# Altium PCB CT310高端控制盒右摇杆电路V1.0.PcbDoc
Units mil, origin at the board's own origin, x right, y up, seen from the top; angles counter-clockwise.
Board outline 1470 x 1470 mil, 2 copper layers (Top Layer, Bottom Layer), stack 65.792 mil thick; 2 components, 4 nets, 16 pads, 4 vias.
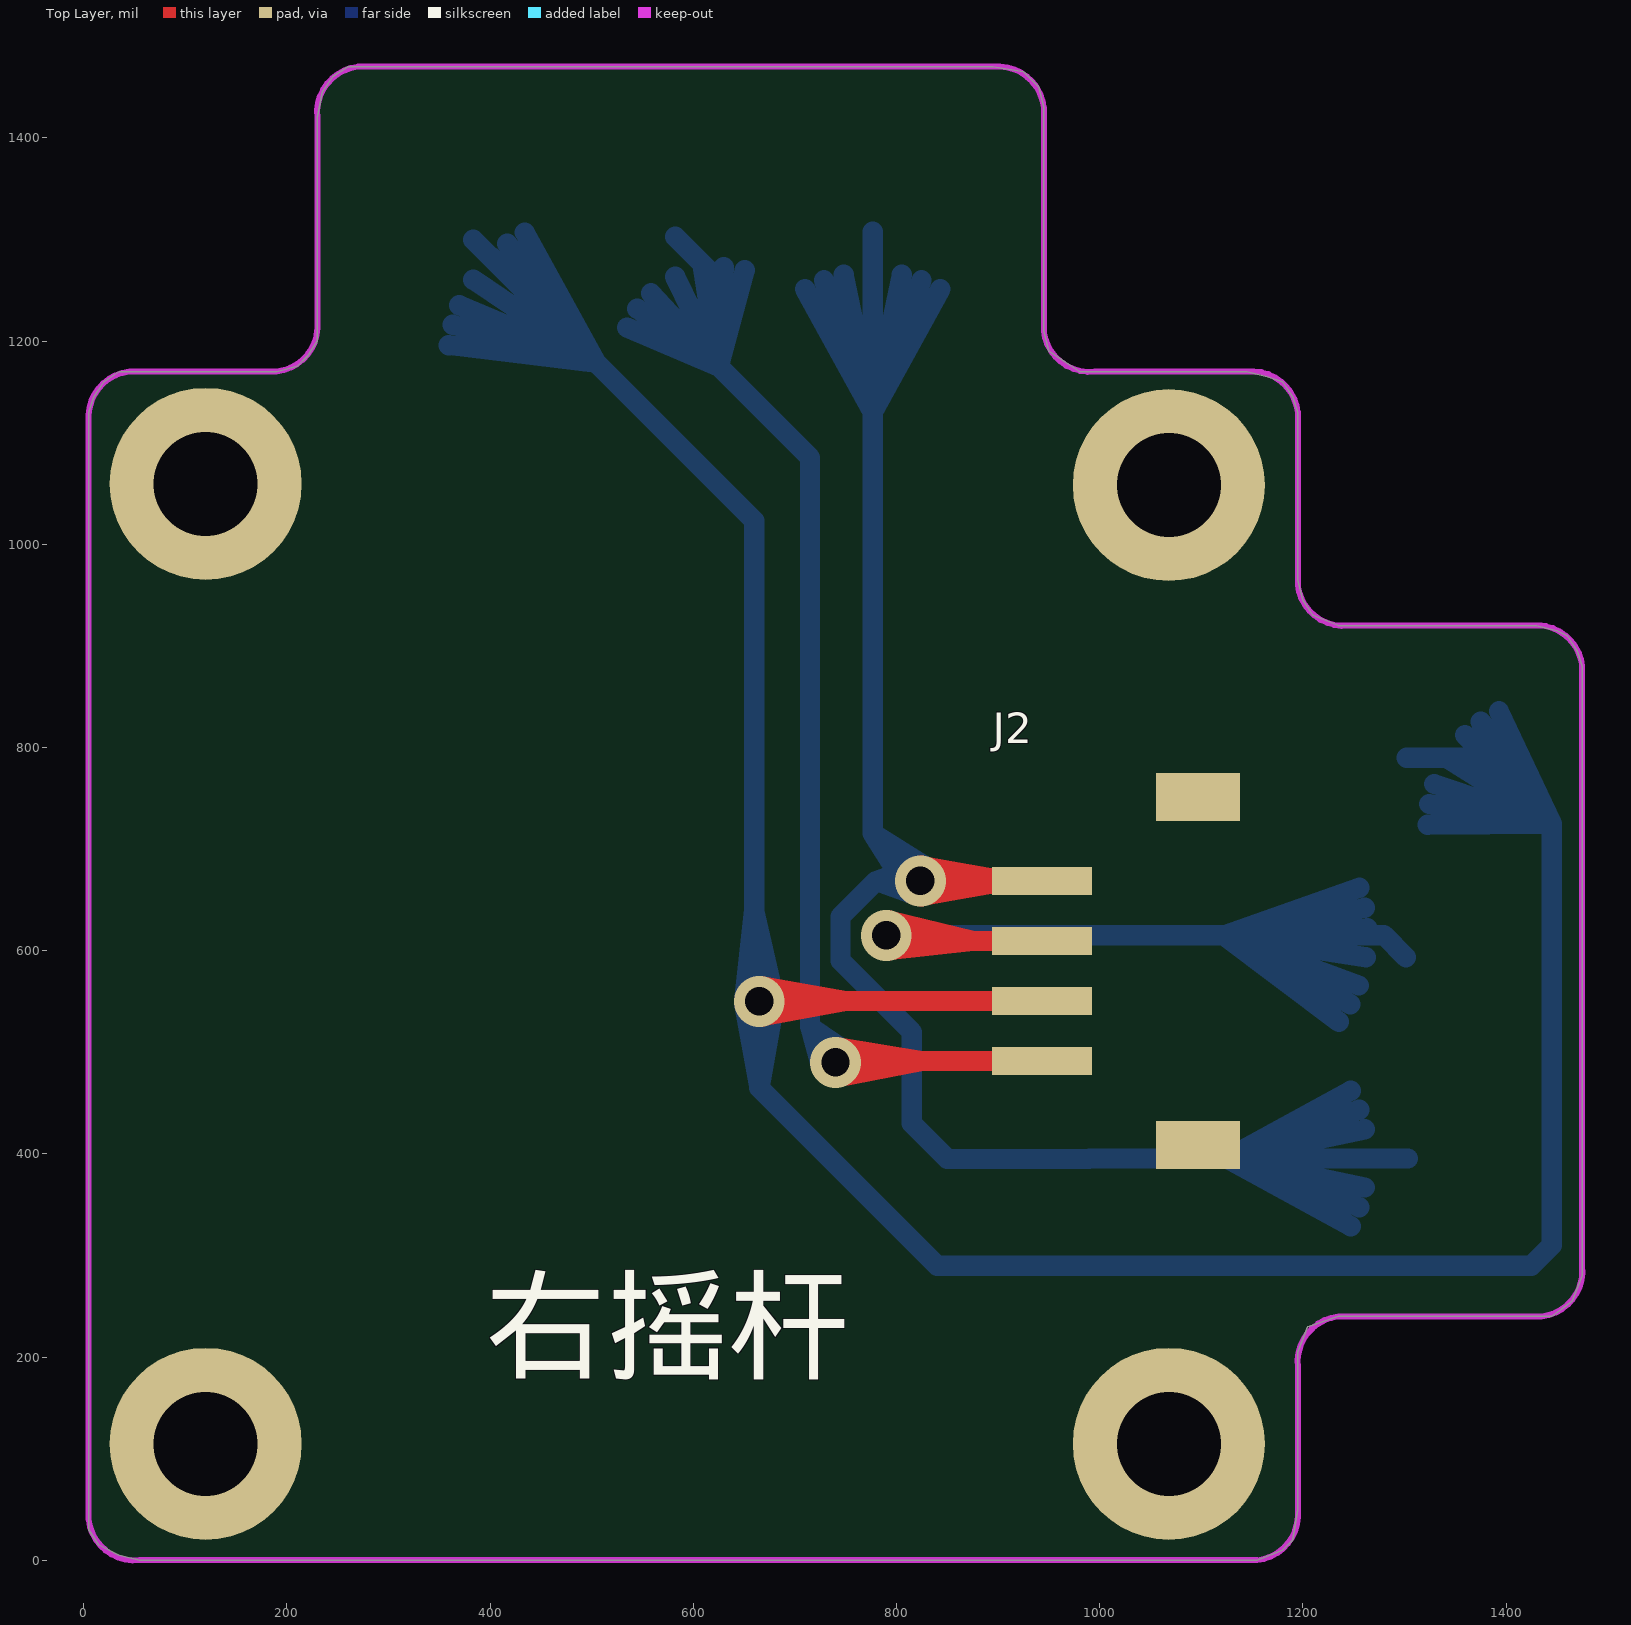
[diagram p0: Top Layer view]
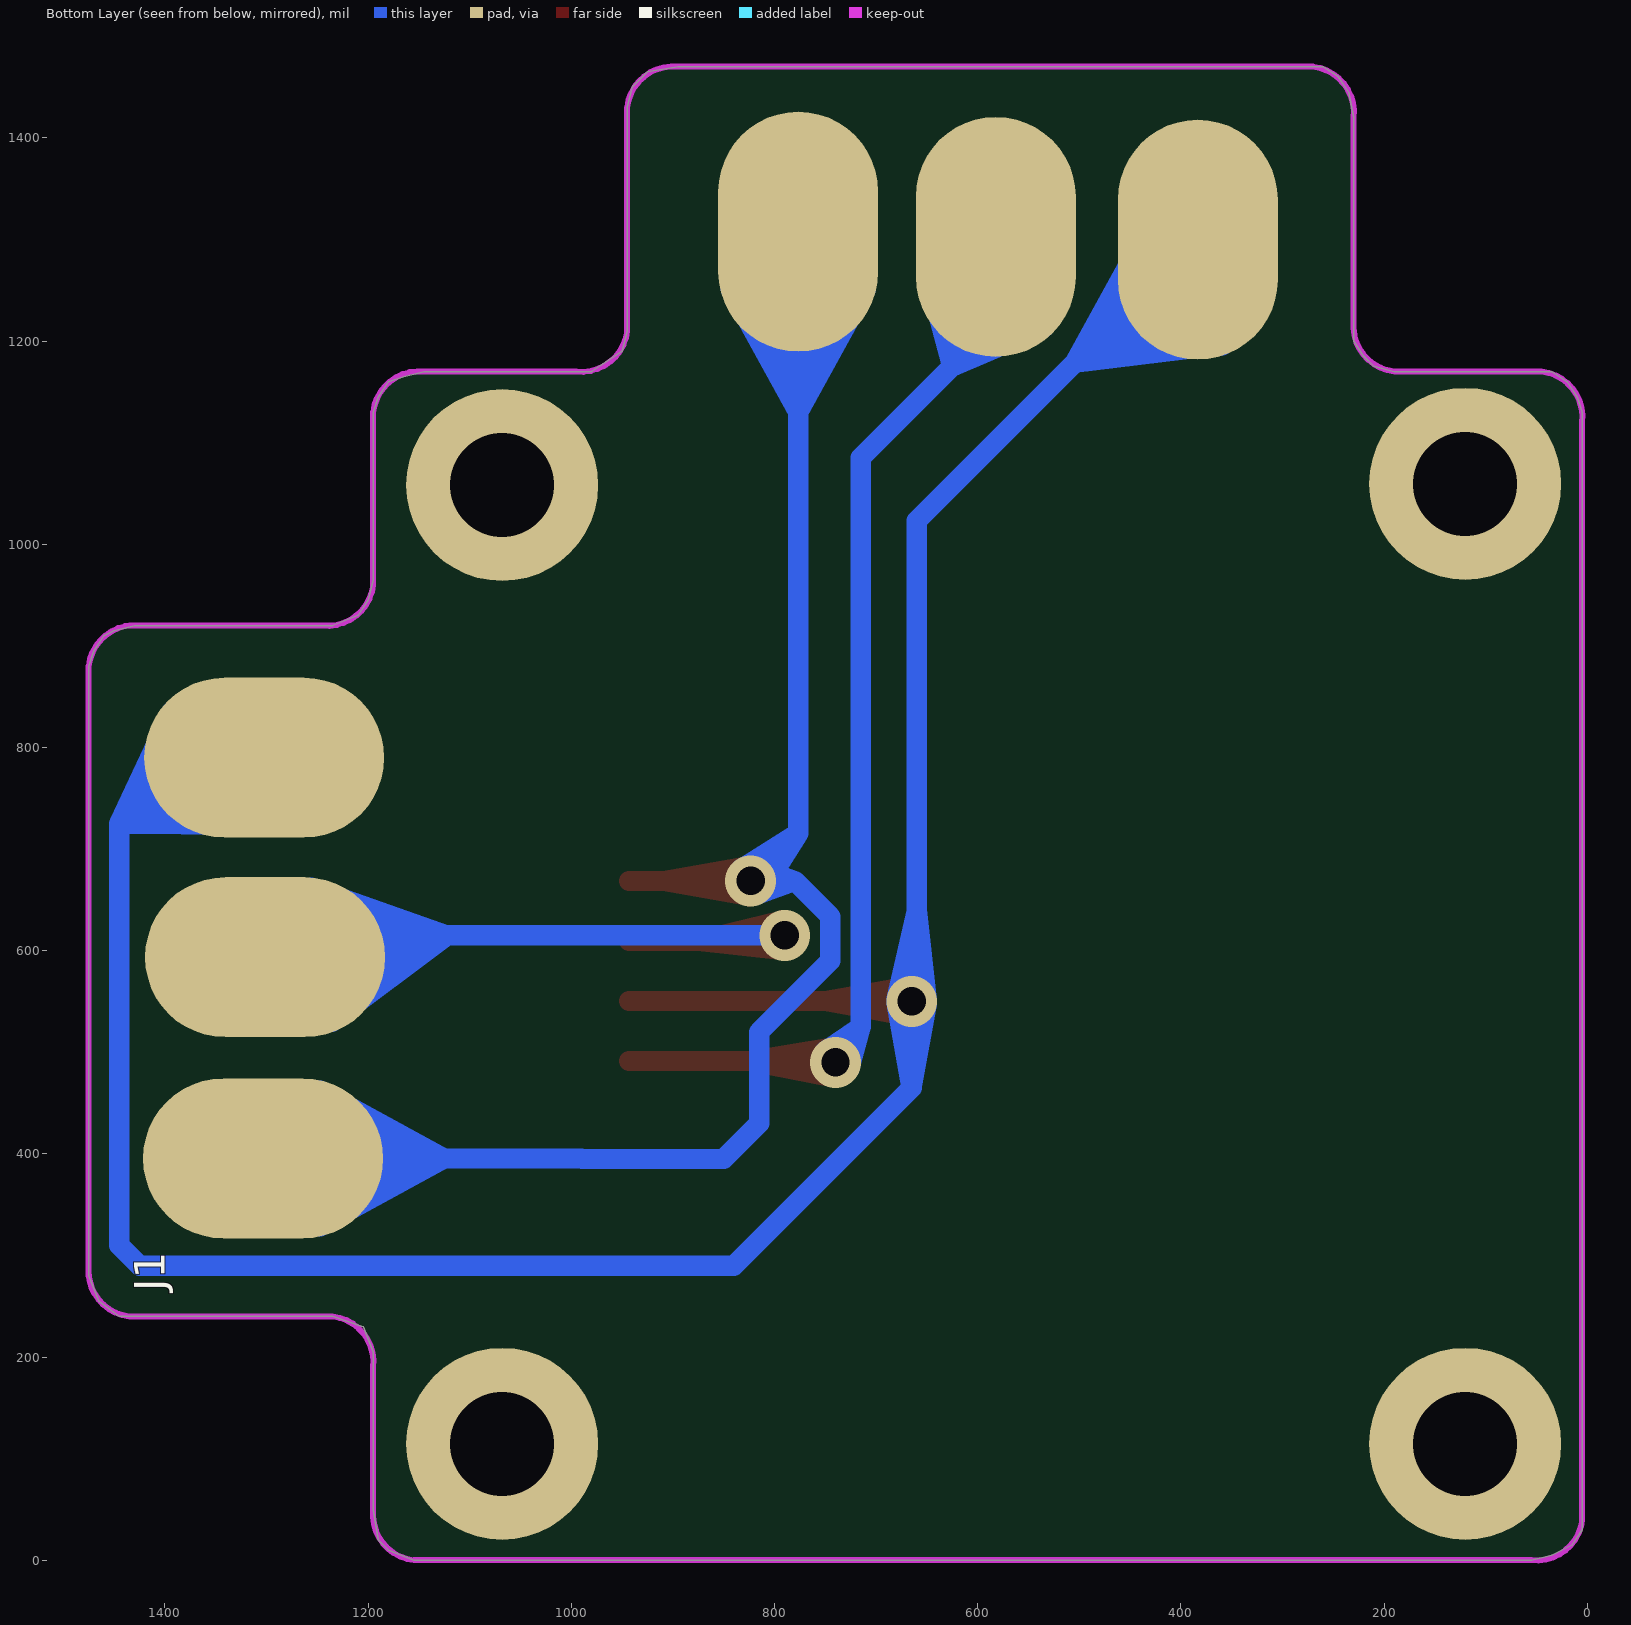
[diagram p1: Bottom Layer view, seen from below]

## Layer stack, top to bottom
Top Layer: signal copper 1.4
Dielectric: core 62.9921, FR-4, Dk 4.8
Bottom Layer: signal copper 1.4

## Board outline
5,1130 10,1145 20,1160 35,1170 45,1170 190,1170 210,1175 220,1185 230,1200 230,1220 230,1420 235,1445 245,1460 260,1470 270,1470 895,1470 925,1465 940,1450 945,1430 945,1210 950,1190 965,1180 980,1170 1010,1170 1145,1170 1165,1165 1180,1160 1190,1145 1195,1130 1195,965 1200,945 1210,930 1235,920 1430,920 1450,915 1460,910 1470,895 1475,880 1475,280 1465,255 1445,240 1435,240 1235,240 1205,230 1195,205 1195,50 1190,20 1180,10 1155,0 55,0 35,5 15,15 5,30 5,50 5,1120 5,1130

## Design rules (kind name [scope] priority, off if disabled: settings)
Clearance [All] p1: gap=10
PolygonConnect [All] p1: connectstyle=Relief reliefconductorwidth=10 reliefentries=4 polygonreliefangle="90 Angle" airgapwidth=10
RoutingVias [All] p1: holewidth=28 width=50 viastyle="Through Hole" minholewidth=28 minwidth=50 maxholewidth=28 maxwidth=50
SilkToSolderMaskClearance SilkscreenOverComponentPads [IsPad] p1: minsilkscreentomaskgap=10 clearancetoexposedcopper=TRUE
SolderMaskExpansion [All] p1: expansion=4
Width [All] p1: maxlimit=100 minlimit=10 preferedwidth=10 minimp=50.000000 maximp=50.000000 favimp=50.000000
27 further rules are at their usual default settings.

## Components (designator, comment, footprint, x,y, rotation, side; value= is the part's Value field where it differs from the comment)
J1 "HEADER1X6" H20JH 711.79,711.12 r0 top
J2 "HEADER1X4" ZH1X4WT-1.5 1020,580 r270 top

## Footprints (in the part's own frame and the unit in brackets; to place one, negate y for a bottom-side part, rotate by r counter-clockwise, add the part's x,y. Pads: shape width x height; smd on the part's side, far side on the other; paste and mask are expansions set on the pad)
H20JH [mm]
  round 4.8 hole 2.6: 0(-15.027,-15.153) 0(-15.027,8.847) 0(9.05,-15.153) 0(9.05,8.818)
  oval 6x4 smd far side: 1(15.027,-8.018) 2(14.977,-2.987) 3(14.998,2.002)
  oval 4x6 smd far side: 4(1.648,15.152) 5(-3.292,15.022) 6(-8.343,14.952)
  body extent -18.03,-18.14 22.47,22.36, height 3.7
ZH1X4WT-1.5 [mm]
  rect 1.2x2.1 smd: 0(-4.35,1.95) 0(4.35,1.95)
  rect 0.7x2.5 smd: 1(-2.25,-1.95) 2(-0.75,-1.95) 3(0.75,-1.95) 4(2.25,-1.95)

## Via types
v1: diameter 50, hole 28, Top Layer to Bottom Layer, tented both sides, 4 vias

## Nets (pads, with @x,y where several pads share a name; then routed paths per layer and width w, separated by ;. In a path a pad name is that pad's centre, name@x,y a point inside that pad or via, vN(x,y) a via of type N, cw(c..) or ccw(c..) an arc to the next point about the centre after c; other vN are vias at no path point)
AX: J1.2 J2.2 | length 1996.6
  Top Layer w20: v1@790,609.53 J2.2 ; v1(790,615) 875.42,609.53 ; v1@790.36,600 875.42,609.53 ; v1@792.27,629.83 875.42,609.53 ; 834.02,609.53 J2.2@907.79,609.53
  Bottom Layer w20: v1(790,615) 1279.96,615 J1.2 ; J1.2@1235.5,530.11 1121.94,615 ; J1.2@1246.53,547.31 1121.94,615 ; J1.2@1254.87,565.68 1121.94,615 ; J1.2@1255.73,661.95 1121.94,615 ; J1.2@1261.08,642.23 1121.94,615 ; J1.2@1262.09,593.5 1121.94,615 ; J1.2@1263.54,622.21 1121.94,615
AY: J1.5 J2.4 | length 2212.4
  Top Layer w20: v1@741.07,504.96 825.03,491.42 ; v1@741.57,475.08 825.03,491.42 ; 834.02,491.42 J2.4@907.79,491.42 ; J2.4 741.42,491.42 v1(740,490) 825.03,491.42
  Bottom Layer w20: J1.5@534.79,1213.38 625,1175 ; J1.5@544.99,1231.66 625,1175 ; J1.5@558.43,1246.98 625,1175 ; J1.5@582.17,1263.19 625,1175 ; J1.5 625,1259.72 625,1175 ; J1.5@609.58,1271.82 625,1175 ; J1.5@629.93,1272.92 625,1175 ; J1.5@650.6,1269.64 625,1175 ; v1@726.46,483.54 715,525 ; v1@737.5,502.5 715,525 ; v1(740,490) 715,525 ; v1@750.5,500.71 715,525 ; 625,1175 715,1085 715,525
GND: J1.3 J1.6 J2.3 | length 5295.3
  Top Layer w20: v1(665,550) 750.02,550.47 ; v1@666.24,564.95 750.02,550.47 ; v1@666.41,535.07 750.02,550.47 ; v1@685.47,550.47 J2.3 ; 834.02,550.47 J2.3@907.79,550.47
  Bottom Layer w20: J1.6@359.36,1196.01 504.51,1178.64 ; J1.6@363.19,1216.05 504.51,1178.64 ; J1.6@369.68,1235.15 504.51,1178.64 ; J1.6@383.35,1260.43 504.51,1178.64 ; J1.6 660,1023.15 660,575 v1@675,560 ; J1.6@401.69,1282.56 504.51,1178.64 ; J1.6@416.97,1295.72 504.51,1178.64 ; J1.6@434.12,1306.77 504.51,1178.64 ; v1@650.01,550.42 660,639.74 ; v1@650.06,548.68 665,465 ; v1@679.85,552.08 660,639.74 ; v1@679.94,548.68 665,465 ; J1.3 1380.04,789.96 1445,725 ; J1.3@1322.91,723.81 1445,725 ; J1.3@1324.44,744.35 1445,725 ; J1.3@1329.29,763.99 1445,725 ; J1.3@1341.61,789.96 1445,725 ; J1.3@1359.66,812.33 1445,725 ; J1.3@1375.26,825.22 1445,725 ; J1.3@1393.09,835.52 1445,725 ; 660,639.74 v1(665,550) 665,465 ; 665,465 840,290 1425,290 1445,310 1445,725
VCC: J1.1 J1.4 J2.1 | length 4265.8
  Top Layer w20: v1@834.02,668.58 J2.1@907.79,668.58 ; J2.1 v1(823.58,668.58) J2.1@907.79,668.58 ; J2.1@907.79,668.58 824.92,653.64 908.58,668.58 824.91,683.52 J2.1@907.79,668.58
  Bottom Layer w20: J1.4@710.06,1251.28 776.65,1129.57 ; J1.4@728.67,1259.74 776.65,1129.57 ; J1.4@748.07,1265.33 776.65,1129.57 ; J1.4@776.65,1268.31 776.65,1129.57 ; J1.4 776.65,715.51 ; J1.4@805.24,1265.33 776.65,1129.57 ; v1@811.84,659.24 776.65,715.51 ; v1@821,653.81 779.94,668.58 ; v1@821,683.36 779.94,668.58 ; J1.4@824.64,1259.74 776.65,1129.57 ; v1@832.92,680.32 776.65,715.51 ; J1.4@843.25,1251.28 776.65,1129.57 ; J1.1@1247.02,328.87 1125.31,395.47 ; J1.1@1247.02,462.07 1125.31,395.47 ; J1.1@1255.49,347.49 1125.31,395.47 ; J1.1@1255.49,443.45 1125.31,395.47 ; J1.1@1261.08,366.89 1125.31,395.47 ; J1.1@1261.08,424.06 1125.31,395.47 ; J1.1@1264.05,395.47 1125.31,395.47 ; J1.1 990,395.47 989.53,395 850,395 815,430 815,520 745,590 745,633.64 779.94,668.58 ; 776.65,715.51 v1(823.58,668.58) 779.94,668.58
pads on no net: J1.0 J2.0

## Keep-outs
Keep-Out Layer:
  lines w5.91: 1235,920 1435,920 ; 1245,920 cw(c1240,965) 1195,960 1195,1130 ccw(c1150,1125) 1145,1170 995,1170 cw(c990,1215) 945,1210 945,1430 ccw(c900,1425) 895,1470 270,1470 ccw(c275,1425) 230,1420 230,1220 cw(c185,1215) 190,1170 45,1170 ccw(c50,1125) 5,1120 5,40 ccw(c50,45) 55,0 1155,0 ccw(c1150,45) 1195,50 1195,190 cw(c1240,195) 1235,240 1435,240 ccw(c1430,285) 1475,290 ; 1425,920 cw(c1430,875) 1475,880 1475,280

## Silkscreen, mask and mechanical layers (free items; w line width, h text height)
Top Overlay:
  text "右摇杆" at 395,160 h150

## Dimensions
55,0 to 270,1470 on Keep-Out Layer
5,40 to 1475,280 on Keep-Out Layer